# Altium PCB conexion unidad central.PcbDoc
Units mil, origin at the board's own origin, x right, y up, seen from the top; angles counter-clockwise.
Board outline 2965 x 2598.43 mil, 2 copper layers (Top Layer, Bottom Layer); 36 components, 31 nets, 142 pads, 46 vias.
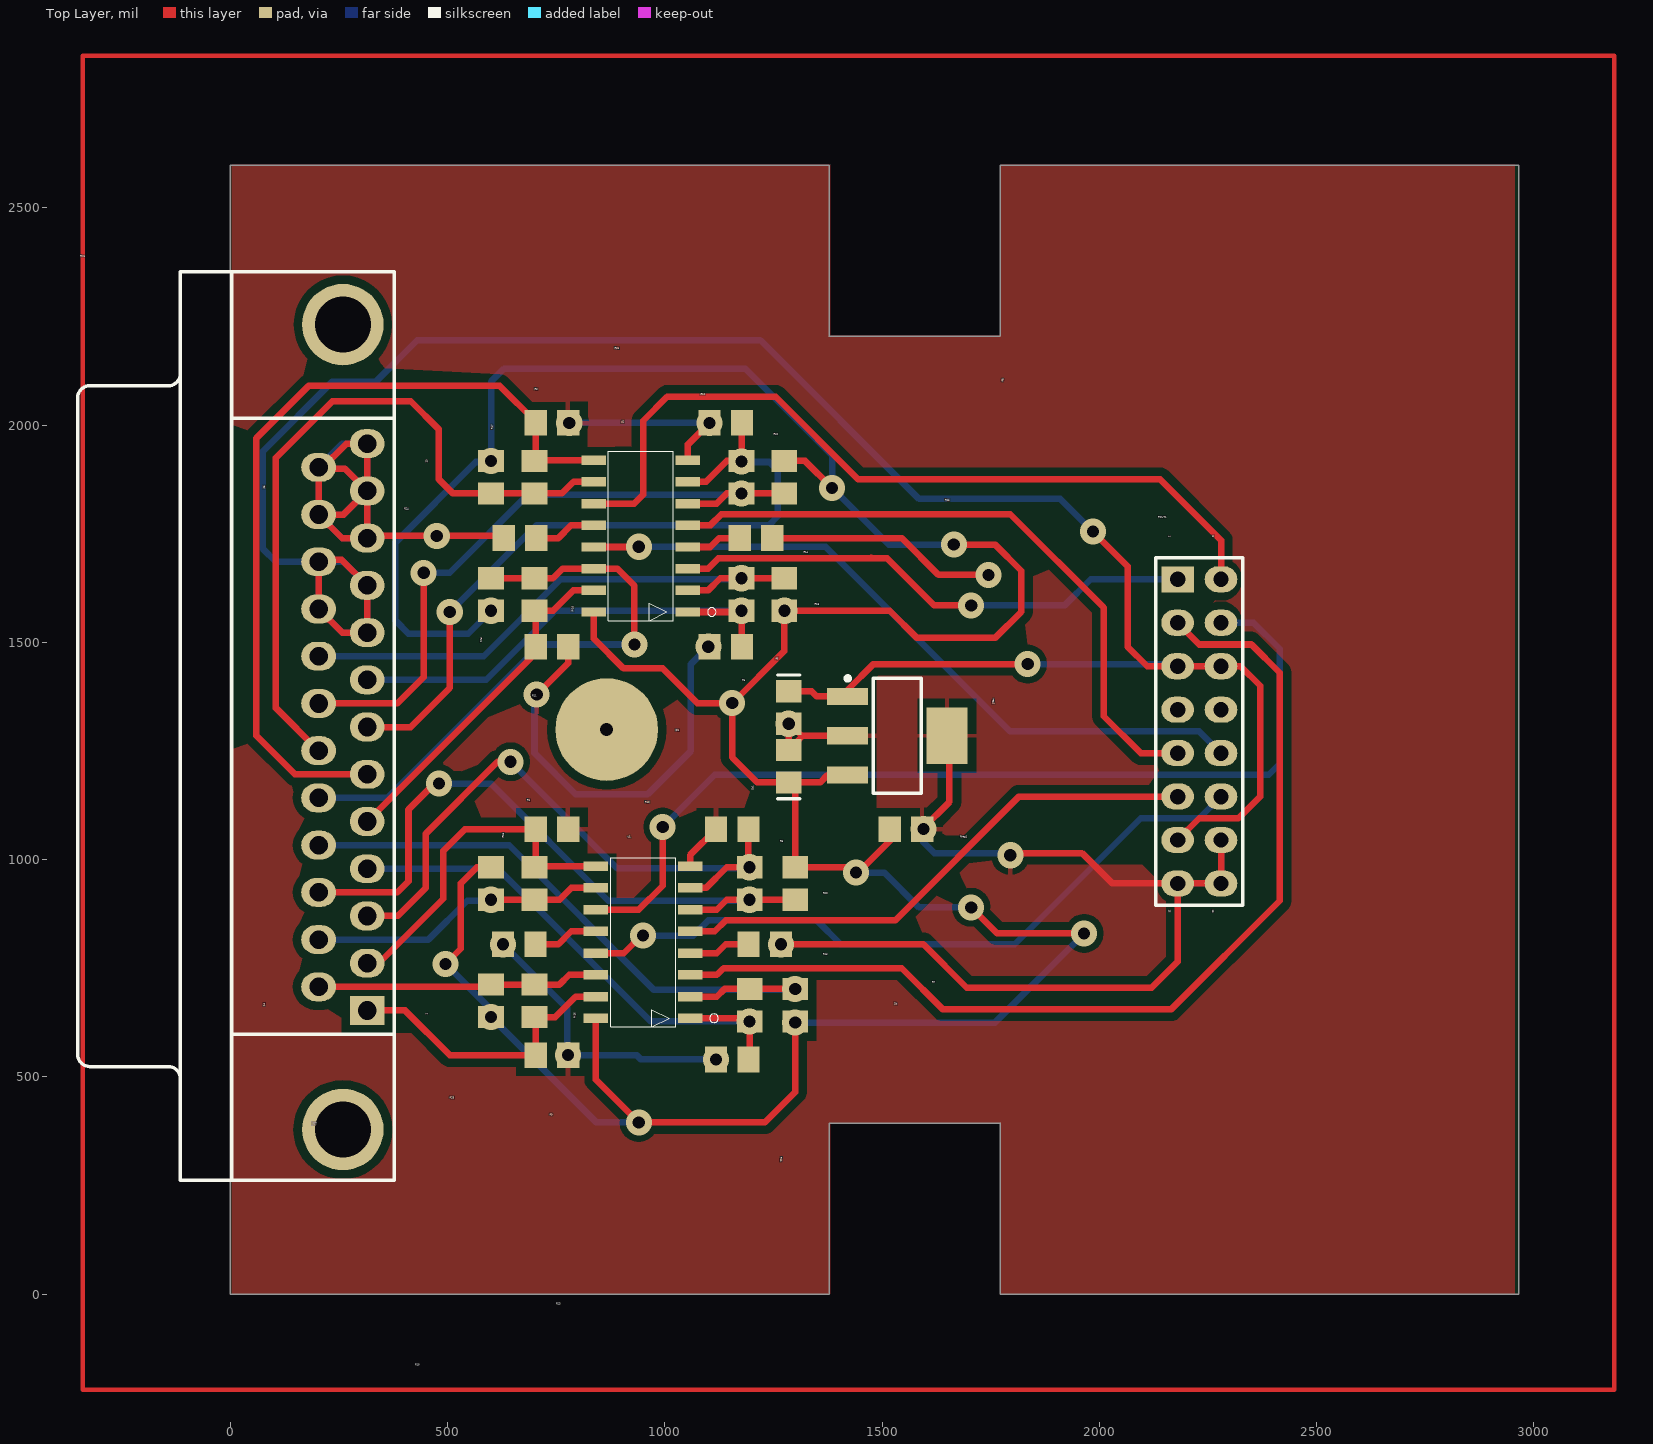
[diagram p0: Top Layer view]
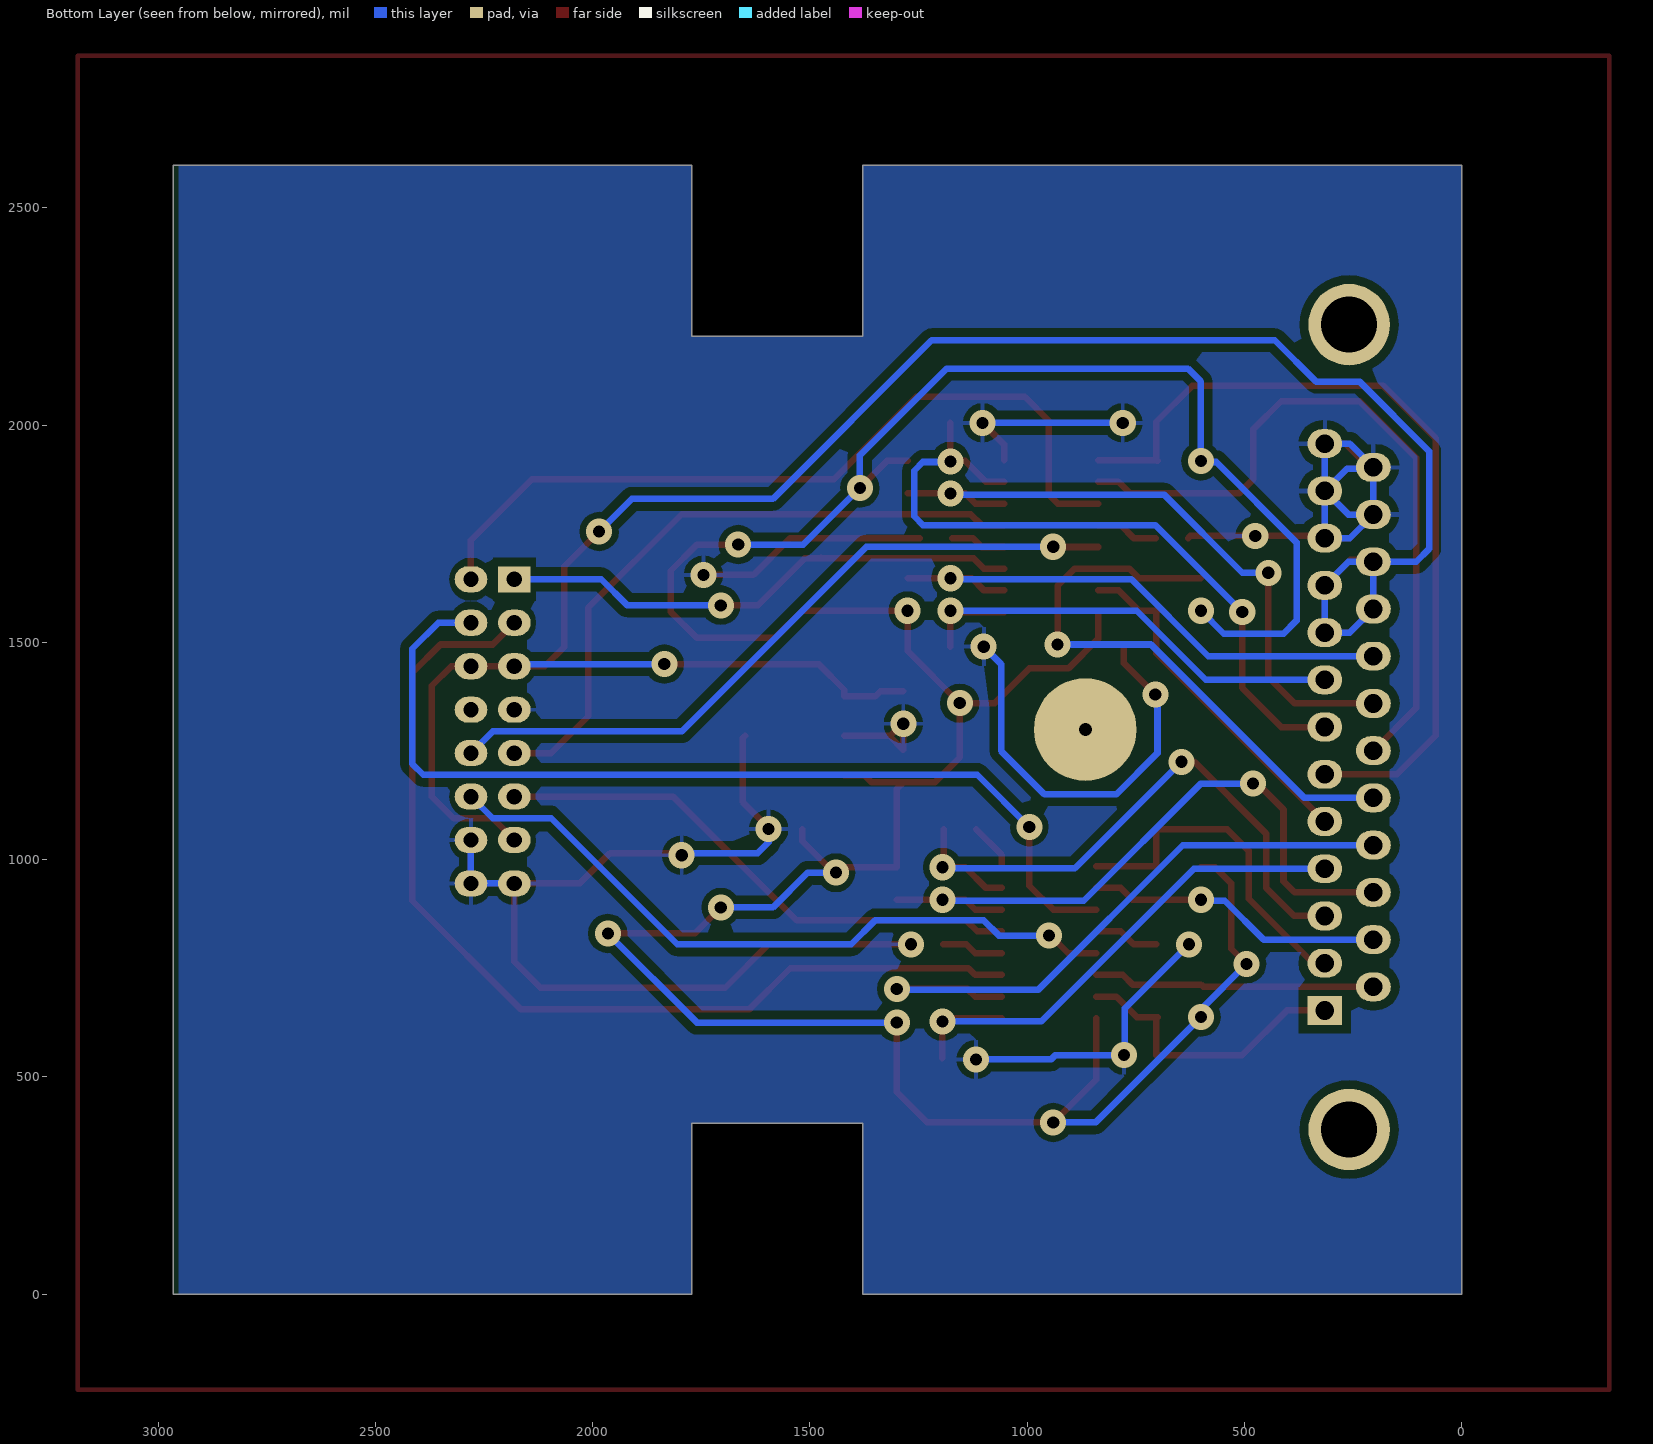
[diagram p1: Bottom Layer view, seen from below]

## Layer stack, top to bottom
Top Layer: signal copper 1.4
Dielectric: dielectric 12.6, FR-4, Dk 4.8
Bottom Layer: signal copper 1.4

## Board outline
0,2598.43 1377.95,2598.43 1377.95,2204.72 1771.65,2204.72 1771.65,2598.43 2965,2598.43 2965,2595 2965,0 2952.76,0 1771.65,0 1771.65,393.7 1377.95,393.7 1377.95,0 0,0 0,2598.43

## Design rules (kind name [scope] priority, off if disabled: settings)
Clearance Clearance_3 [InNamedPolygon('Top Layer')] p1: gap=19.68
Clearance Clearance_2 [InNamedPolygon('Bottom Layer')] p2: gap=19.68
Clearance Clearance_1 [InNamedPolygon('Bottom Layer')] p3: gap=23.62
Clearance [All] p4: gap=10
PolygonConnect [All] p1: connectstyle=Relief reliefconductorwidth=10 reliefentries=4 polygonreliefangle="90 Angle"
RoomDefinition regulador [InComponentClass('regulador')] p1: confinementstyle=ConfineIn formatcopy=TRUE lockcomponents=FALSE outline 5870,-470 6910,-470 6910,-70 5870,-70
RoomDefinition drivers [InComponentClass('drivers')] p2: confinementstyle=ConfineIn formatcopy=TRUE lockcomponents=FALSE outline -845,-915 8472.6,-915 8472.6,3570 -845,3570
RoutingVias [All] p1: holewidth=28 width=50 viastyle="Through Hole" minholewidth=28 minwidth=50 maxholewidth=28 maxwidth=50
SilkscreenOverComponentPads [All] p1: minsilkscreentomaskgap=10
SolderMaskExpansion [All] p1: expansion=4
TestPointUsage FabricationTestPointUsage [All] p1: valid=0 allowmultiple=FALSE
Testpoint FabricationTestpoint [All] p1: side=3 testpointundercomponent=TRUE minsize=40 maxsize=100 preferedsize=60 minholesize=0 maxholesize=40 preferedholesize=32 testpointgrid=1 style=297 order=0-112345678
Width [All] p1: maxlimit=15 minlimit=15 preferedwidth=15
23 further rules are at their usual default settings.

## Classes and differential pairs
component class regulador: Ci1 Co1 reg1 Rreg1
component class drivers: Pin1 POUT1 R1 R2 R3 R4 R5 R6 R7 R8 R9 R10 R11 R12 R13 R14 R15 R16 R17 R18 R19 R20 R21 R22 R23 R24 R25 R26 R27 R28 u1 u2

## Components (designator, comment, footprint, x,y, rotation, side; value= is the part's Value field where it differs from the comment)
Ci1 "Cap Pol3" C0805 1285,1350 r270 top
Co1 "Cap Pol3" C0805 1285,1215 r90 top
Pin1 "D Connector 25" DSUB1.385-2H25A -115,1305 r90 top
POUT1 "Header 8X2" HDR2X8 2180,1645 r270 top
R1 "Res Semi" 2012[0805] 740,1070 r0 top
R2 "Res Semi" 2012[0805] 1155,540 r180 top
R3 "Res Semi" 2012[0805] 740,2005 r0 top
R4 "Res Semi" 2012[0805] 1140,1490 r180 top
R5 "Res Semi" 2012[0805] 1176.53,1610 r270 top
R6 "Res Semi" 2012[0805] 1195,945 r270 top
R7 "Res Semi" 2012[0805] 1195,665 r270 top
R8 "Res Semi" 2012[0805] 1176.53,1880 r270 top
R9 "Res Semi" 2012[0805] 740,550 r0 top
R10 "Res Semi" 2012[0805] 1155,1070 r180 top
R11 "Res Semi" 2012[0805] 740,1490 r0 top
R12 "Res Semi" 2012[0805] 1140,2005 r180 top
R13 "Res Semi" 2012[0805] 1230,805 r180 top
R14 "Res Semi" 2012[0805] 1210,1740 r180 top
R15 "Res Semi" 2012[0805] 600,945 r90 top
R16 "Res Semi" 2012[0805] 1300,665 r270 top
R17 "Res Semi" 2012[0805] 600,1880 r90 top
R18 "Res Semi" 2012[0805] 1275,1610 r270 top
R19 "Res Semi" 2012[0805] 600,675 r270 top
R20 "Res Semi" 2012[0805] 1300,945 r90 top
R21 "Res Semi" 2012[0805] 600,1610 r270 top
R22 "Res Semi" 2012[0805] 1275,1880 r90 top
R23 "Res Semi" 2012[0805] 665,805 r180 top
R24 "Res Semi" 2012[0805] 666.54,1740 r180 top
R25 "Res Semi" 2012[0805] 700,1880 r90 top
R26 "Res Semi" 2012[0805] 700,1610 r90 top
R27 "Res Semi" 2012[0805] 700,675 r90 top
R28 "Res Semi" 2012[0805] 700,945 r90 top
reg1 "LM3940IMP-3.3" MP04A_N 1535,1285 r0 top
Rreg1 "Res Semi" 2012[0805] 1555,1070 r180 top
u1 "SNlvdt33d" R-16 950,810 r90 top
u2 "SNlvdt33d" R-16 945,1745 r90 top

## Footprints (in the part's own frame and the unit in brackets; to place one, negate y for a bottom-side part, rotate by r counter-clockwise, add the part's x,y. Pads: shape width x height; smd on the part's side, far side on the other; paste and mask are expansions set on the pad)
2012[0805] [mm] "Chip Resistor; Body 2.0 x 1.3 mm (LxW typ)"
  rect 1.3x1.5 smd: 1(-0.95,0) 2(0.95,0)
C0805 [mm] "Chip Capacitor; Body 2.0 x 1.2 mm (LxW typ)"
  rect 1.3x1.5 smd: 1(-0.95,0) 2(0.95,0)
  silkscreen extent -1.9,-0.65 -1.9,0.65
DSUB1.385-2H25A [mm] "Connector; D Subminiature; 25 Position; Right Angle; Pitch 1.385 mm"
  rect 1.69x2.032 hole 1.09: 1(-16.566,-10.92)
  oval 1.69x2.032 hole 1.09: 2(-13.805,-10.92) 3(-11.044,-10.92) 4(-8.283,-10.92) 5(-5.522,-10.92) 6(-2.761,-10.92) 7(0,-10.92) 8(2.761,-10.92) 9(5.522,-10.92) 10(8.283,-10.92) 11(11.044,-10.92) 12(13.805,-10.92) 13(16.566,-10.92) 14(-15.186,-8.08) 15(-12.424,-8.08) 16(-9.663,-8.08) 17(-6.903,-8.08) 18(-4.141,-8.08) 19(-1.381,-8.08) 20(1.381,-8.08) 21(4.142,-8.08) 22(6.902,-8.08) 23(9.664,-8.08) 24(12.424,-8.08) 25(15.186,-8.08)
  round 4.76 hole 3.26: 26(-23.526,-9.5) 27(23.526,-9.5)
  silkscreen extent -26.5,-12.5 26.6,6
HDR2X8 [mil] "Connector; Header; 8x2 Position"
  rect 60x75 hole 35.43: 1(0,0)
  oval 60x75 hole 35.43: 2(0,100) 3(100,0) 4(100,100) 5(200,0) 6(200,100) 7(300,0) 8(300,100) 9(400,0) 10(400,100) 11(500,0) 12(500,100) 13(600,0) 14(600,100) 15(700,0) 16(700,100)
  silkscreen extent -50,-50 750,150
MP04A_N [mm] "SOT223, 4-Leads, Body 6.5x3.5mm, Pitch 2.3mm, Lead Span 7mm, IPC Medium Density"
  rect 2.4x1 smd: 1(-2.9,2.3) 2(-2.9,0) 3(-2.9,-2.3)
  rect 2.4x3.3 smd: 4(2.9,0)
  silkscreen extent -3.02,-3.35 1.4,3.47, body extent -1.85,-3.35 1.85,3.35, height 1.8
R-16 [mm]
  rect 0.551x1.43 smd: 1(-4.45,-2.745) 2(-3.19,-2.745) 3(-1.91,-2.745) 4(-0.65,-2.745) 5(0.63,-2.745) 6(1.89,-2.745) 7(3.17,-2.745) 8(4.43,-2.745) 9(4.43,2.757) 10(3.17,2.757) 11(1.89,2.757) 12(0.63,2.757) 13(-0.65,2.757) 14(-1.91,2.757) 15(-3.19,2.757) 16(-4.45,2.757)
  silkscreen extent -4.96,-4.39 4.94,1.91

## Part data
Ci1 Co1: "Polarized Capacitor (Surface Mount)"
Pin1: "Receptacle Assembly, 25 Position, Right Angle"
POUT1: "Header, 8-Pin, Dual row"
R1 R2 R3 R4 R5 R6 R7 R8 R9 R10 R11 R12 R13 R14 R15 R16 R17 R18 R19 R20 R21 R22 R23 R24 R25 R26 R27 R28 Rreg1: "Semiconductor Resistor"
reg1: "1A Low Dropout Regulator for 5V to 3.3V Conversion, 4-pin SOT-223"

## Free pads (board coordinates)
  round 236.22 hole 30: 12(866.14,1299.21)

## Via types
v1: diameter 60, hole 28, Top Layer to Bottom Layer, 46 vias

## Nets (pads, with @x,y where several pads share a name; then routed paths per layer and width w, separated by ;. In a path a pad name is that pad's centre, name@x,y a point inside that pad or via, vN(x,y) a via of type N, cw(c..) or ccw(c..) an arc to the next point about the centre after c; other vN are vias at no path point)
GND_ISO: Ci1.2 Co1.2 Pin1.11 Pin1.12 Pin1.13 Pin1.24 Pin1.25 POUT1.7 POUT1.14 POUT1.15 POUT1.16 R1.2 R2.2 R3.2 R4.2 R9.2 R10.2 R11.2 R12.2 R13.1 R14.1 R23.2 R24.2 reg1.2 reg1.4 Rreg1.1 u1.8 u2.8 | length 7456.8
  Top Layer w15: Pin1.25 Pin1.24 ; R24.2 624.13,1745 v1(475,1745) 320.12,1745 Pin1.11 ; v1(705,1380) 777.4,1452.4 R11.2 ; R3.2 v1(780,2005) ; u2.8 1053.07,1955.47 v1(1102.6,2005) ; u1.8 1058.07,1010.47 R10.2 ; R14.1 1545,1740 1630,1655 v1(1745,1655) ; v1(1267.4,805) 1595,805 1695,705 2120,705 2180,765 POUT1.15 ; v1(1285,1312.6) Co1.2 1317.6,1285 ; Ci1.2@1290,1310 1315,1285 1317.6,1285 ; reg1.2 1317.6,1285 ; Rreg1.1 v1(1595,1070) ; Rreg1.1@1593.7,1071.3 1655,1132.6 1655,1279.17 reg1.4 ; v1(1795,1010) 1800,1015 1960,1015 2030,945 POUT1.16 POUT1.14 ; Pin1.24 260.57,1794.15 Pin1.12 ; Pin1.24 257.46,1739.8 Pin1.11 ; Pin1.11 Pin1.12 ; Pin1.12 Pin1.13 267.21,1957.21 210,1900 263.43,1900 Pin1.12
  Bottom Layer w15: Pin1.25 Pin1.25@203.11,1900 ; v1(627.61,804.99) 775,657.6 775,552.4 v1(777.4,550) 935,550 945,540 v1(1117.6,540) ; v1(705,1380) 700,1375 700,1245 795,1150 960,1150 1060,1250 1060,1450 v1(1100,1490) ; v1(780,2005) v1(1102.6,2005) ; v1(1595,1070) 1595,1040 1620,1015 1790,1015 v1(1795,1010) ; POUT1.15 POUT1.16 POUT1.14 ; Pin1.24 257.46,1739.8 Pin1.11 Pin1.13 257.21,1957.21 200,1900 Pin1.25@203.11,1900 ; Pin1.24 Pin1.25@203.11,1900 ; Pin1.24 260.57,1794.15 Pin1.12 263.43,1900 Pin1.25@203.11,1900
NetR13_2: R13.2 u1.4 | length 143.1
  Top Layer w15: u1.4 1119.4,784.4 1140,805 R13.2
NetR14_2: R14.2 u2.4 | length 128.1
  Top Layer w15: u2.4 1104.4,1719.4 1125,1740 R14.2
NetR23_1: R23.1 u1.12 | length 151.4
  Top Layer w15: R23.1 755,805 784.8,834.8 u1.12
NetR24_1: R24.1 u2.12 | length 144.9
  Top Layer w15: R24.1 755,1740 784.8,1769.8 u2.12
PM1: POUT1.9 u2.5 | length 1511.6
  Top Layer w15: u2.5 1105.15,1769.8 1130.36,1795 1795,1795 2010,1580 2010,1330 2095,1245 POUT1.9
PM1_N: Pin1.7 R8.1 R12.1 u2.7 | length 1680.1
  Top Layer w15: Pin1.7 415,1305 505,1395 v1(505,1570) ; u2.7 1094.8,1869.8 1142.4,1917.4 R8.1 1177.4,1918.27 R12.1
  Bottom Layer w15: v1(505,1570) 705,1770 1240,1770 1260,1790 1260,1895 1240,1915 1175,1915 v1(1176.53,1916.53)
PM1_P: Pin1.20 R8.2 R22.1 u2.6 | length 1549
  Top Layer w15: Pin1.20 384.35,1359.35 445,1420 v1(445,1660) ; u2.6 1119.4,1819.4 1142.6,1842.6 v1(1176.53,1842.6) R22.1 ; R8.2@1179.13,1840 R8.2@1180,1840
  Bottom Layer w15: v1(445,1660) 505,1660 685,1840 v1@1180,1840
PM2: POUT1.10 u2.13 | length 1640.5
  Top Layer w15: u2.13 939.4,1719.4 v1(940,1720)
  Bottom Layer w15: v1(940,1720) 1370,1720 1795,1295 2230,1295 POUT1.10
PM2_N: Pin1.5 R11.1 R26.1 u2.15 | length 802.5
  Top Layer w15: Pin1.5 702.6,1475.28 R11.1 702.6,1570 R26.1 742.6,1572.6 789.4,1619.4 u2.15
PM2_P: Pin1.18 R21.1 R26.2 u2.14 | length 1363.9
  Top Layer w15: R21.1 R26.2 742.4,1647.4 764.8,1669.8 u2.14 890.2,1669.8 930,1630 v1(930,1495)
  Bottom Layer w15: Pin1.18 361.95,1141.95 715,1495 v1(930,1495)
PM3: POUT1.11 u1.5 | length 1250.4
  Top Layer w15: u1.5 1114.8,834.8 1140,860 1530,860 1815,1145 POUT1.11
PM3_N: Pin1.3 R6.1 R10.1 u1.7 | length 1447.1
  Top Layer w15: Pin1.3 385.2,870.2 450,935 450,1060 615,1225 v1(645,1225) ; u1.7 1094.8,934.8 1142.4,982.4 v1(1195,982.4) 1192.4,985 R10.1
  Bottom Layer w15: v1(645,1225) 890,980 v1@1195,980
PM3_P: Pin1.16 R6.2 R20.1 u1.6 | length 1545.7
  Top Layer w15: Pin1.16 384.55,924.55 410,950 410,1115 v1@470,1175 ; u1.6 1119.4,884.4 1142.6,907.6 v1(1195,907.6) R20.1
  Bottom Layer w15: v1(480,1175) 600,1175 870,905 v1@1195,905
PM4: POUT1.12 u1.13 | length 1633.5
  Top Layer w15: u1.13 905.6,784.4 946.2,825 v1(950,825)
  Bottom Layer w15: v1(950,825) 1065,825 1100,860 1350,860 1405,805 1805,805 2095,1095 2230,1095 POUT1.12
PM4_N: Pin1.1 R9.1 R27.1 u1.15 | length 679.8
  Top Layer w15: Pin1.1 402.2,652.8 505,550 R9.1 702.6,635 R27.1 747.6,637.6 794.4,684.4 u1.15
PM4_P: Pin1.14 R19.1 R27.2 u1.14 | length 649.8
  Top Layer w15: Pin1.14 594.74,707.15 R19.1 R27.2 757.4,712.4 779.8,734.8 u1.14
PT1: POUT1.1 u2.3 | length 1209
  Top Layer w15: u2.3 1099.8,1669.8 1122.97,1692.97 1472.97,1692.97 ; 1475,1695 1472.97,1692.97 ; v1(1705,1585) 1620,1585 1512.03,1692.97 1472.97,1692.97
  Bottom Layer w15: v1(1705,1585) 1920,1585 1980,1645 POUT1.1
PT1_N: Pin1.8 R4.1 R5.2 u2.1 | length 1135
  Top Layer w15: u2.1 1173.73,1569.8 v1(1176.53,1572.6) 1177.4,1571.73 R4.1
  Bottom Layer w15: Pin1.8 588.7,1413.7 747.6,1572.6 v1(1176.53,1572.6)
PT1_P: Pin1.21 R5.1 R18.1 u2.2 | length 1278.7
  Top Layer w15: u2.2 1099.4,1619.4 1127.4,1647.4 v1(1176.53,1647.4) R18.1
  Bottom Layer w15: Pin1.21 583.05,1468.05 760,1645 v1@1175,1645
PT2: POUT1.2 u2.11 | length 1871.5
  Top Layer w15: u2.11 929.4,1819.4 950,1840 950,2010 1005,2065 1255,2065 1445,1875 2140,1875 2280,1735 POUT1.2
PT2_N: Pin1.6 R3.1 R25.2 u2.9 | length 1928.7
  Top Layer w15: Pin1.6 148.7,1196.3 60,1285 60,1970 180,2090 620,2090 702.6,2007.4 R3.1 702.6,1920 R25.2 ; R25.2@702,1919.4 u2.9
PT2_P: Pin1.19 R17.1 R25.1 u2.10 | length 1666.9
  Top Layer w15: Pin1.19 105,1348.76 105,1925 235,2055 415,2055 480,1990 480,1875 512.4,1842.6 R17.1 R25.1 762.6,1842.6 789.8,1869.8 u2.10
PT3: POUT1.3 u1.3 | length 2313.8
  Top Layer w15: u1.3 1119.8,734.8 1135,750 1545,750 1640,655 2165,655 2415,905 2415,1430 2350,1495 2230,1495 POUT1.3
PT3_N: Pin1.4 R2.1 R7.2 u1.1 | length 1250.5
  Top Layer w15: u1.1 1187.8,634.8 v1(1195,627.6) R2.1@1195,542.6
  Bottom Layer w15: Pin1.4 616.1,978.9 967.4,627.6 v1(1195,627.6)
PT3_P: Pin1.17 R7.1 R16.1 u1.2 | length 1484.3
  Top Layer w15: u1.2 1119.4,684.4 1137.4,702.4 R7.1 v1(1300,702.4)
  Bottom Layer w15: Pin1.17 418.25,1033.25 641.75,1033.25 975,700 v1@1300,700
PT4: POUT1.4 u1.11 | length 2216.5
  Top Layer w15: u1.11 939.4,884.4 995,940 v1(995,1075)
  Bottom Layer w15: v1(995,1075) 1115,1195 2390,1195 2415,1220 2415,1485 2355,1545 POUT1.4
PT4_N: Pin1.2 R1.1 R28.2 u1.9 | length 807.2
  Top Layer w15: Pin1.2 341.5,761.5 490,910 490,1020 540,1070 R1.1 R28.2@702.6,985 ; R28.2 702,984.4 u1.9
PT4_P: Pin1.15 R15.1 R28.1 u1.10 | length 686.6
  Top Layer w15: v1(600,907.6) R28.1 757.6,907.6 784.8,934.8 u1.10
  Bottom Layer w15: Pin1.15 455.85,815.85 545,905 v1@600,905
VCC: Co1.1 R15.2 R16.2 R17.2 R18.2 R19.2 R20.2 R21.2 R22.2 reg1.3 Rreg1.2 u1.16 u2.16 | length 7877.4
  Top Layer w15: v1(495,760) 530,795 530,945 567.4,982.4 R15.2 ; R19.2@590,627.6 v1(600,637.6) ; u2.16 836.47,1508.53 905,1440 995,1440 1075,1360 v1(1155,1360) ; u1.16 841.47,493.53 v1(940,395) 1230,395 1300,465 v1(1300,625) R16.2 ; R22.2 1322.6,1917.4 v1(1385,1855) ; reg1.3 1374.45,1194.45 1357.6,1177.6 Co1.1 ; Rreg1.2 1517.6,1042.6 1457.4,982.4 1427.6,982.4 R20.2 1300,1162.6 Co1.1 ; v1(1665,1725) 1760,1725 1820,1665 1820,1570 1760,1510 1580,1510 1517.4,1572.6 v1(1275,1572.6) 1275,1480 v1(1155,1360) ; v1(1705,890) 1765,830 v1(1965,830) ; v1(1155,1360) 1155,1235 1212.4,1177.6 Co1.1
  Bottom Layer w15: v1(495,760) 600,655 v1(600,637.6) 842.6,395 v1(940,395) ; v1(600,1572.6) 547.4,1520 410,1520 380,1550 380,1730 565,1915 597.99,1915 600,1917.01 v1(600,1917.4) 600,2100 630,2130 1185,2130 1385,1930 v1(1385,1855) 1515,1725 v1(1665,1725) ; v1(1300,625) 1760,625 v1(1965,830) ; v1(1440,970) 1505,970 1585,890 v1(1705,890)
VCC_ISO: Ci1.1 Pin1.9 Pin1.10 Pin1.22 Pin1.23 POUT1.5 POUT1.6 POUT1.13 reg1.1 | length 5606.9
  Top Layer w15: Pin1.23 Pin1.22 257.46,1522.4 Pin1.9 Pin1.10 256.03,1690 Pin1.23@205,1690 ; Ci1.1 1337.6,1387.4 1349.45,1375.55 reg1.1 1420.83,1390.83 1480,1450 v1(1835,1450) ; v1(1985,1755) 2065,1675 2065,1490 2110,1445 POUT1.5 POUT1.6 2325,1445 2370,1400 2370,1145 2320,1095 2230,1095 POUT1.13
  Bottom Layer w15: Pin1.23@200,1685 Pin1.23@203.11,1685 ; v1(1835,1450) 2175,1450 POUT1.5 ; v1(1985,1755) 1910,1830 1585,1830 1220,2195 430,2195 335,2100 235,2100 75,1940 75,1715 104.55,1685.45 Pin1.23 Pin1.23@203.11,1685 ; Pin1.23@203.11,1685 261.03,1685 Pin1.10 Pin1.9 257.46,1522.4 Pin1.22 Pin1.23@203.11,1685
pads on no net: Pin1.26 Pin1.27 POUT1.8
copper on no net: | length 13190
  Top Layer w10: -340,-220 -340,2850 3185,2850 3185,-220 -340,-220

## Polygon pours and split planes (outlines as drawn)
GND_ISO on Top Layer "Top Layer" (solid, remove dead copper, pour order 1001): 2.76,2599.43 1380.71,2599.43 1380.71,2205.73 1774.41,2205.73 1774.41,2599.43 2955.51,2599.43 2955.51,1 1774.41,1 1774.41,394.7 1380.71,394.7 1380.71,1 2.76,1 2.76,2599.43
GND_ISO on Bottom Layer "Bottom Layer" (solid, remove dead copper, pour order 1000): 0,2598.43 1377.95,2598.43 1377.95,2204.72 1771.65,2204.72 1771.65,2598.43 2952.76,2598.43 2952.76,0 1771.65,0 1771.65,393.7 1377.95,393.7 1377.95,0 0,0 0,2598.43

## Text inside footprints (layer, text, board x,y; h text height)
Pin1: Top Overlay "25" at 80.87,1853.64 h3.94 r90; Top Overlay "14" at 80.87,662.85 h3.94 r90; Top Overlay "13" at 454.88,1912.91 h3.94 r90; Top Overlay "1" at 454.88,642.95 h3.94 r90
POUT1: Top Overlay "16" at 2260,885 h3.94 r270; Top Overlay "15" at 2160,885 h3.94 r270; Top Overlay "1" at 2160,1745 h3.94 r270; Top Overlay "2" at 2260,1745 h3.94 r270
u1: Top Overlay "R-16" at 795,635 h3.94 r90
u2: Top Overlay "R-16" at 790,1570 h3.94 r90